# Altium PCB PCB.Autolabor.PcbDoc
Units mm, origin at the board's own origin, x right, y up, seen from the top; angles counter-clockwise.
Board outline 100 x 100 mm, 2 copper layers (Top Layer, Bottom Layer); 35 components, 13 nets, 160 pads, 5 vias.
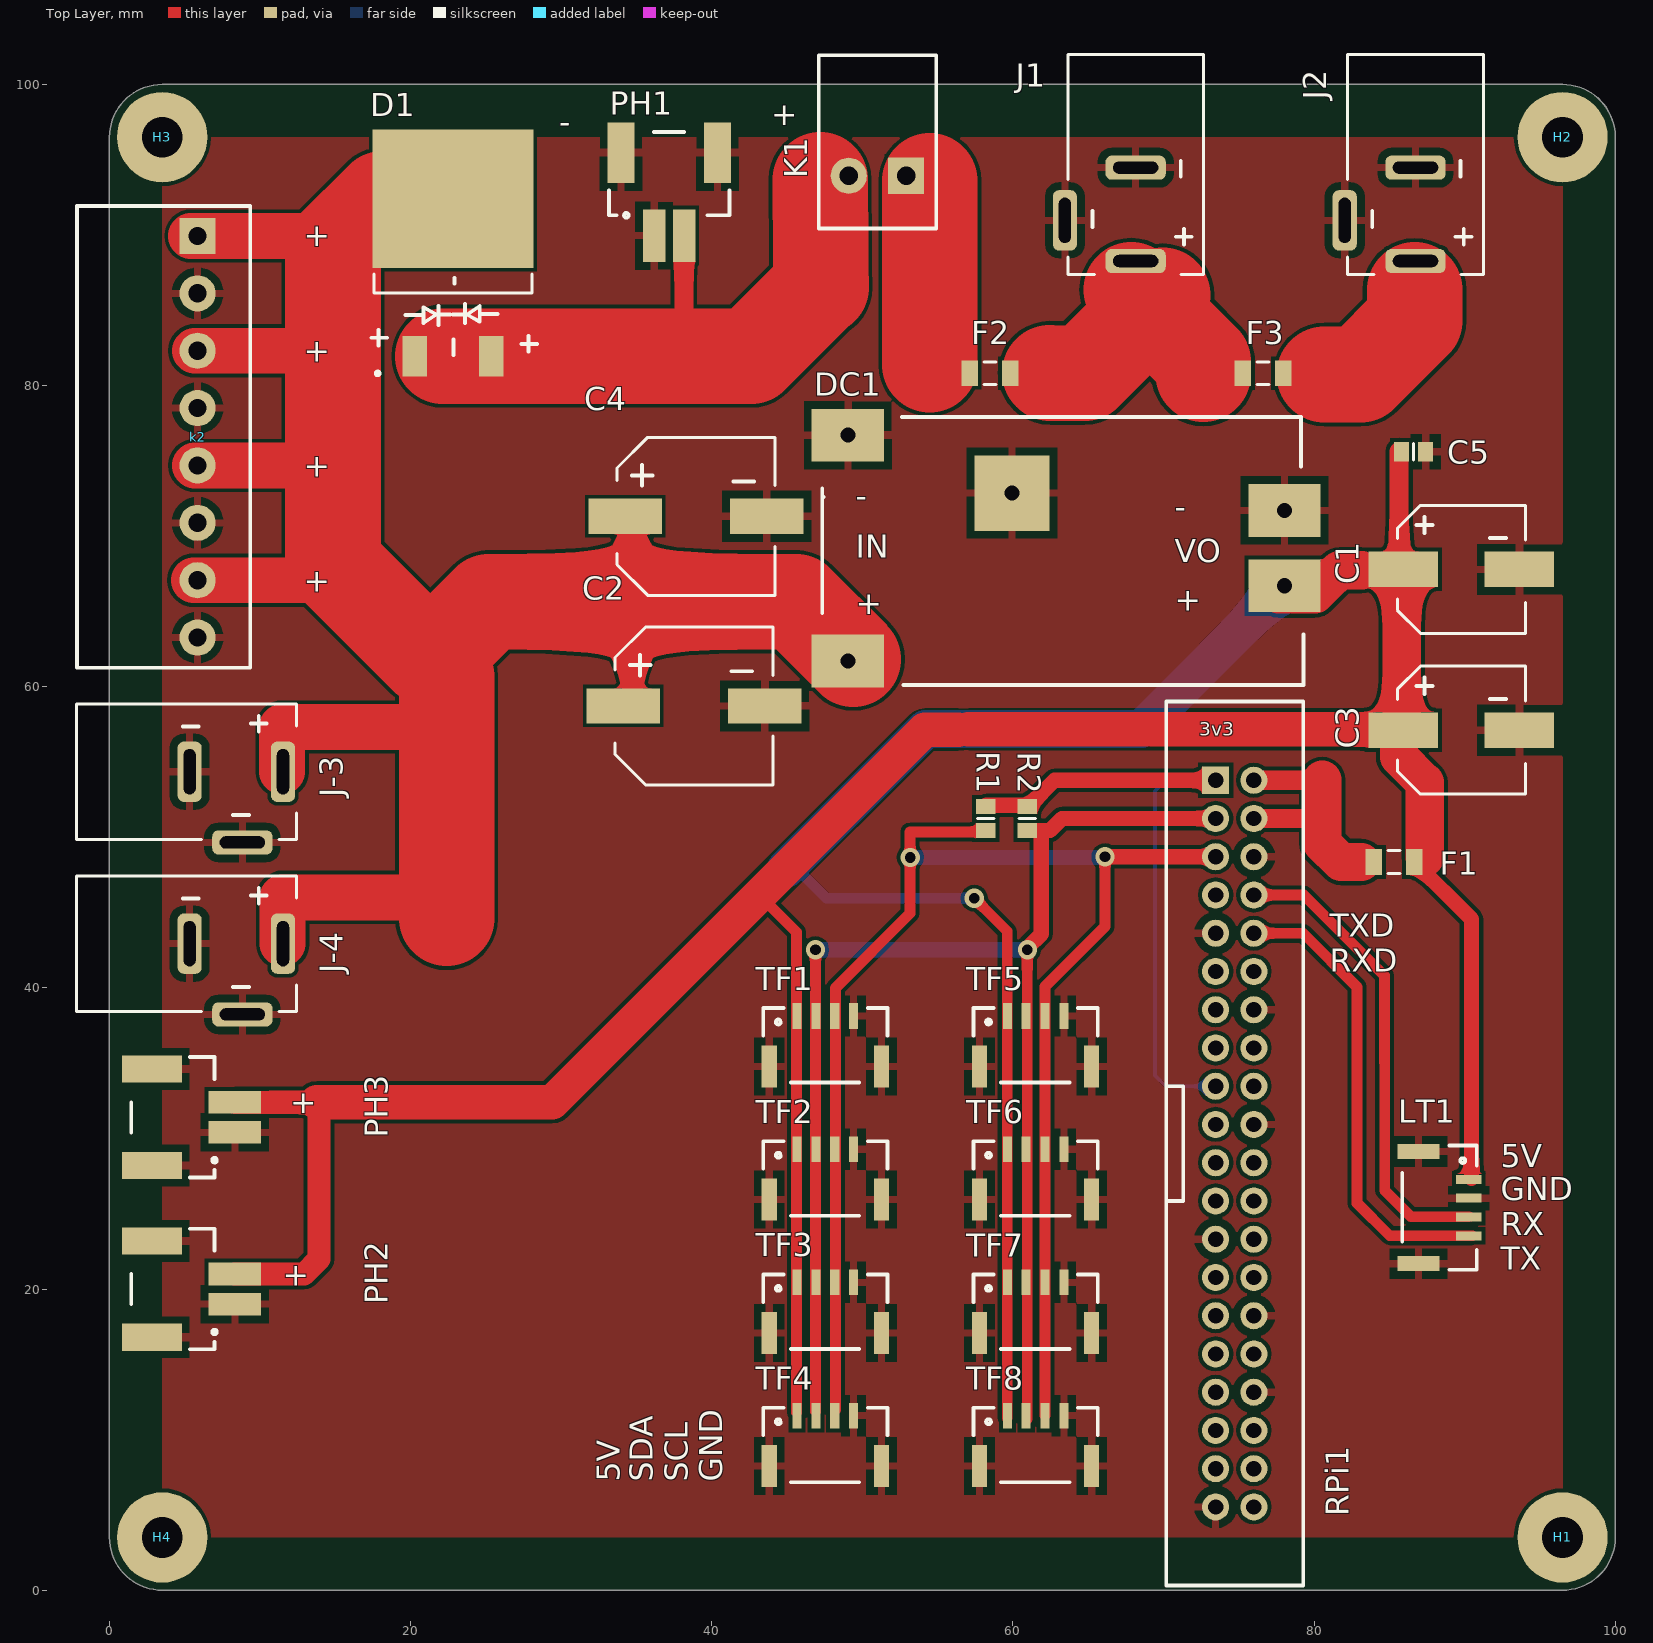
[diagram p0: Top Layer view]
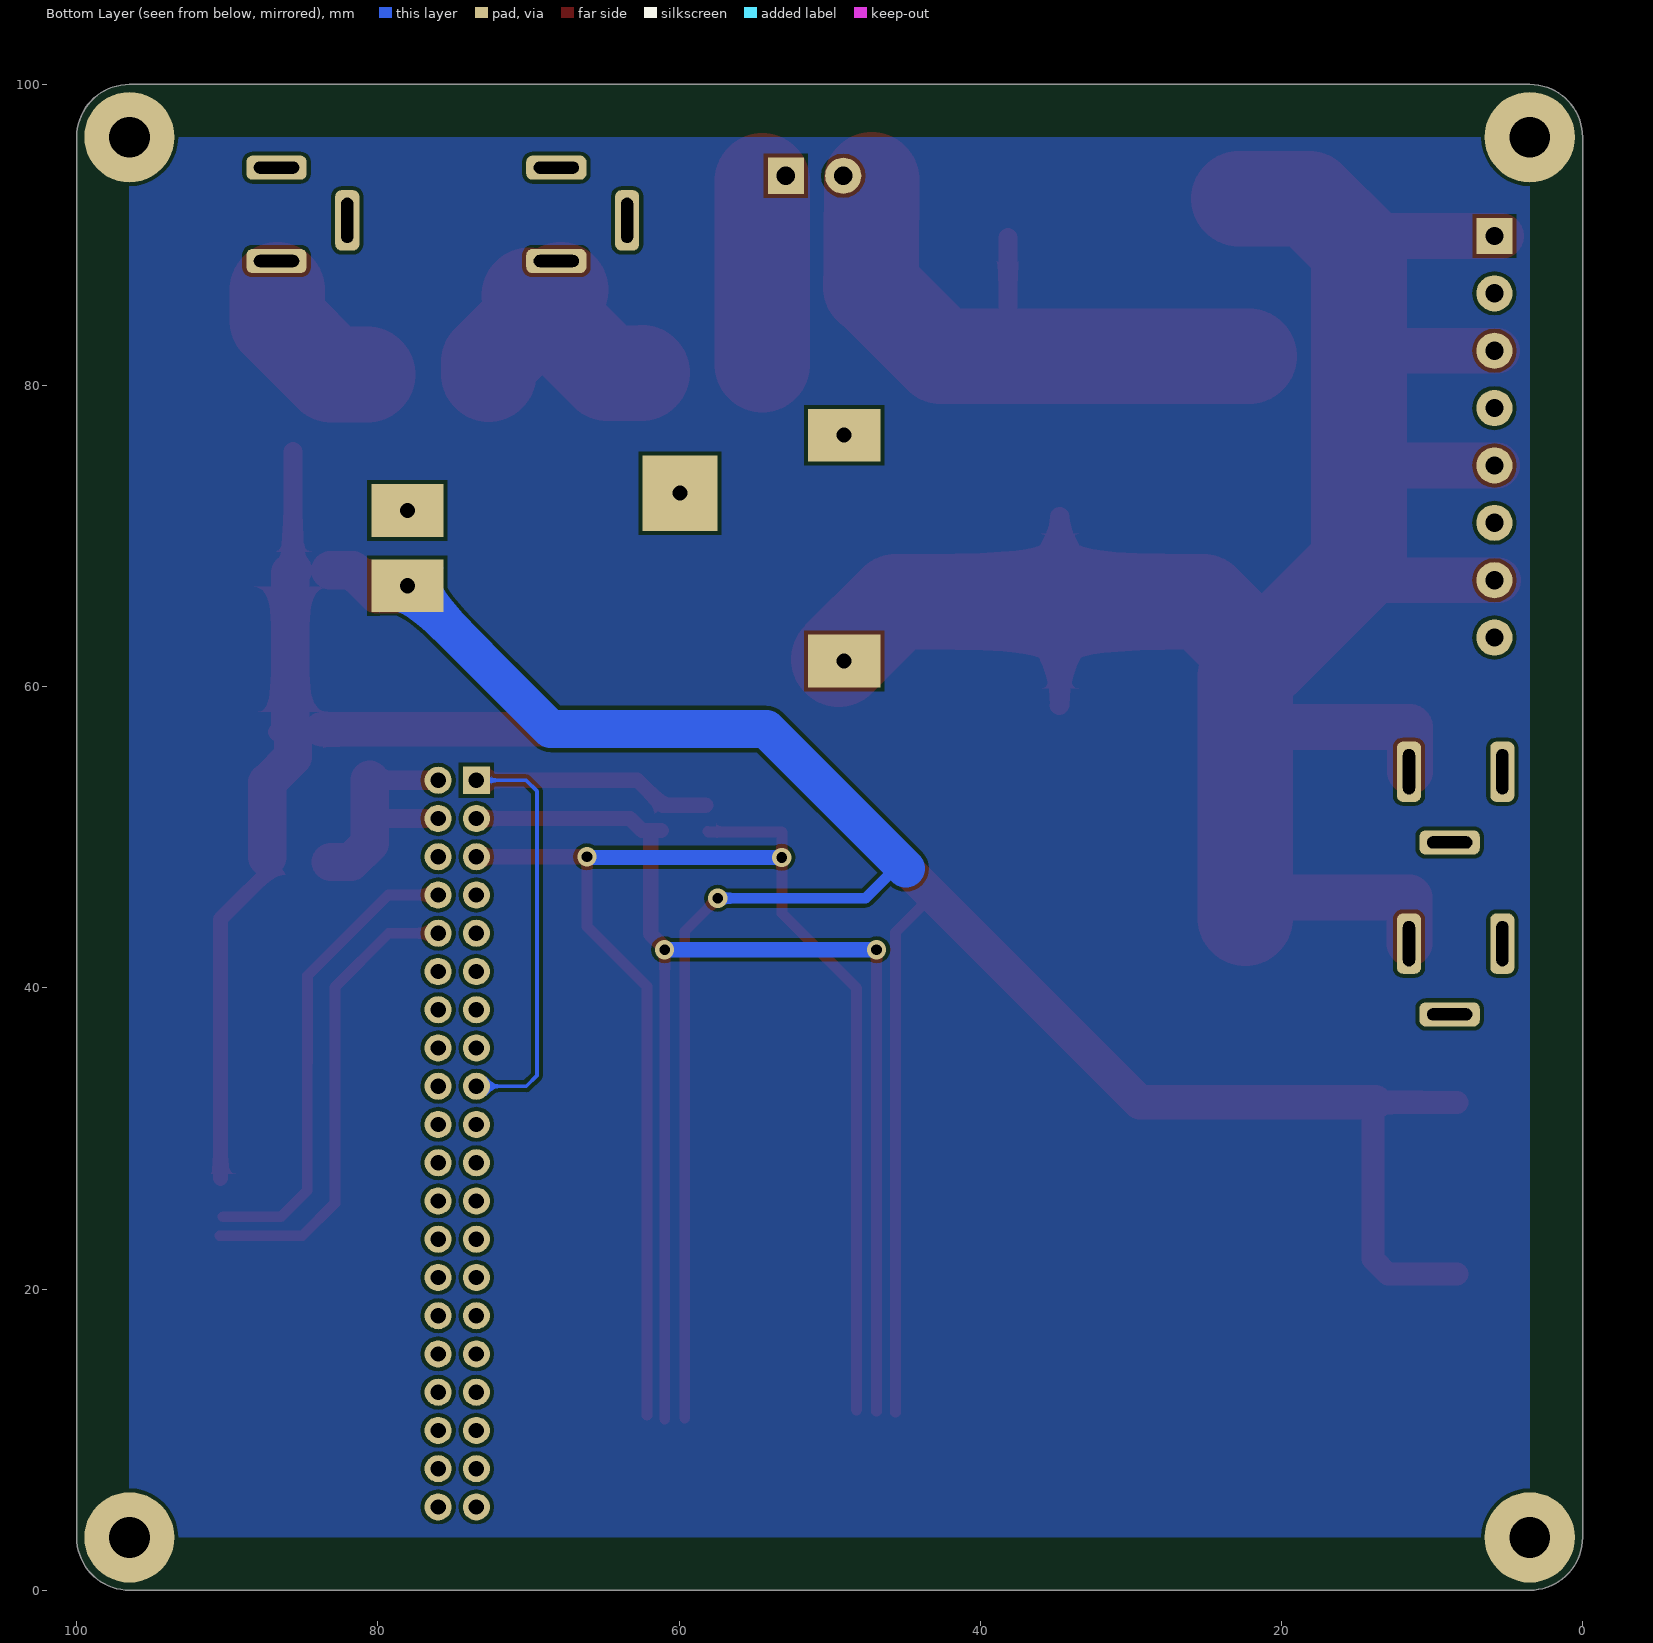
[diagram p1: Bottom Layer view, seen from below]

## Layer stack, top to bottom
Top Solder: solder mask 0.0102, Solder Resist, Dk 3.5
Top Layer: signal copper 0.0356
Dielectric 1: dielectric 0.32, FR-4, Dk 4.8
Bottom Layer: signal copper 0.0356
Bottom Solder: solder mask 0.0102, Solder Resist, Dk 3.5

## Board outline
0,3.5 0,96.5 cw(c3.5,96.5) 3.5,100 96.5,100 cw(c96.5,96.5) 100,96.5 100,3.5 cw(c96.5,3.5) 96.5,0 3.5,0 cw(c3.5,3.5)

## Design rules (kind name [scope] priority, off if disabled: settings)
AcuteAngle [All] p1: minimum=6.00000000000000E+0001 checktracksonly=FALSE
Clearance [All] p1: gap=0.254 ignorepadtopadclearanceinfootprint=FALSE
HoleSize [All] p1: absolutevalues=TRUE maxlimit=6.3 minlimit=0.25 maxpercent=80.000 minpercent=20.000
PolygonConnect [All] p1: connectstyle=Relief reliefconductorwidth=0.508 reliefentries=4 polygonreliefangle="90 Angle" airgapwidth=0.508
RoutingVias [All] p1: holewidth=0.711 width=1.27 viastyle="Through Hole" minholewidth=0.711 minwidth=1.27 maxholewidth=0.711 maxwidth=1.27
SMDNeckDown [All] p1 off: percent=50.000
SilkToSolderMaskClearance [IsPad] p1: minsilkscreentomaskgap=0.152 clearancetoexposedcopper=TRUE
SolderMaskExpansion [All] p1: expansion=0.102
Width Width_12V_5A [InNetClass('CHARGE12V5A')] p1: maxlimit=6.35 minlimit=2.54 preferedwidth=2.54
Width Width_5V_2A [InNetClass('PWR5V4A')] p2: maxlimit=5.08 minlimit=0.254 preferedwidth=2.54
Width Width_12V_10A [InNetClass('BAT12V10A')] p3: maxlimit=6.35 minlimit=2.54 preferedwidth=2.54
Width [All] p4: maxlimit=7.62 minlimit=0.254 preferedwidth=0.254
28 further rules are at their usual default settings.

## Classes and differential pairs
component class Sheet.Autolabor: LT1 R1 R2 RPi1 TF1 TF2 TF3 TF4 TF5 TF6 TF7 TF8
component class Sheet.Autolabor.Power: C1 C2 C3 C4 C5 D1 DC1 F1 F2 F3 H1 H2 H3 H4 J1 J2 J-3 J-4 K1 k2 PH1 PH2 PH3

## Components (designator, comment, footprint, x,y, rotation, side; value= is the part's Value field where it differs from the comment)
C1 "Cap Pol1" CAPAE8883X102M 89.778,67.795 r0 top value=470uF
C2 "Cap Pol1" CAPAE108103X102M 38.819,58.722 r0 top value=1000uF
C3 "Cap Pol1" CAPAE8883X102M 89.778,57.111 r0 top value=470uF
C4 "Cap Pol1" CAPAE108103X102M 38.951,71.317 r0 top value=1000uF
C5 "Cap" 6-0805_L 86.609,75.605 r180 top value=0.1uF
D1 "MBRB2060" D2PAK_M 22.813,88.808 r90 top
DC1 "DM21_40W05S" DM21_40W05S-HOLE 49.037,61.704 r0 top
F1 "Fuse  3A" C1206 85.3,48.362 r0 top
F2 "Fuse 10A" C1206 58.471,80.823 r180 top
F3 "Fuse 10A" C1206 76.606,80.823 r180 top
H1 "HOLE-2.7-6" HOLE-2.7-6#1 55.068,-8.561 r0 top
H2 "HOLE-2.7-6" HOLE-2.7-6#2 119.842,58.425 r0 top
H3 "HOLE-2.7-6" HOLE-2.7-6#3 59.182,72.009 r0 top
H4 "HOLE-2.7-6" HOLE-2.7-6#4 -0.254,-0.127 r0 top
J1 "PWR2.5" KLD-0202-SLOT 68.148,101.971 r270 top
J2 "PWR2.5" KLD-0202-SLOT 86.733,101.971 r270 top
J-3 "PWR2.5" KLD-0202-SLOT -2.175,54.357 r0 top
J-4 "PWR2.5" KLD-0202-SLOT -2.175,42.938 r0 top
K1 "KF2EDG-2P" KF2EDG-3.81-2P 52.908,93.932 r180 top
k2 "KF2EDG-8P" KF2EDG-3.81-8P 5.852,89.934 r270 top
LT1 "LinkTrack" GH1.25-S-4P-small 90.276,27.283 r270 top
PH1 "PH2.0-2p" PH2.0-LIE-2P 36.172,89.957 r0 top
PH2 "PH2.0-2p" PH2.0-LIE-2P 8.326,19 r90 top
PH3 "PH2.0-2p" PH2.0-LIE-2P 8.326,30.403 r90 top
R1 "Res2" 6-0805_L 58.188,51.245 r90 top value=1K8
R2 "Res2" 6-0805_L 60.955,51.245 r90 top value=1K8
RPi1 "Raspberrypi4B" RPi-40p-small 73.46,53.789 r0 top
TF1 "TFmini Plus" GH1.25-S-4P-small 45.666,38.136 r0 top
TF2 "TFmini Plus" GH1.25-S-4P-small 45.666,29.288 r0 top
TF3 "TFmini Plus" GH1.25-S-4P-small 45.666,20.44 r0 top
TF4 "TFmini Plus" GH1.25-S-4P-small 45.666,11.592 r0 top
TF5 "TFmini Plus" GH1.25-S-4P-small 59.628,38.136 r0 top
TF6 "TFmini Plus" GH1.25-S-4P-small 59.628,29.288 r0 top
TF7 "TFmini Plus" GH1.25-S-4P-small 59.628,20.44 r0 top
TF8 "TFmini Plus" GH1.25-S-4P-small 59.628,11.592 r0 top

## Footprints (in the part's own frame and the unit in brackets; to place one, negate y for a bottom-side part, rotate by r counter-clockwise, add the part's x,y. Pads: shape width x height; smd on the part's side, far side on the other; paste and mask are expansions set on the pad)
6-0805_L [mm] "Chip Resistor, Body 2.0x1.2mm, IPC High Density"
  rect 1x1.3 smd: 1(-0.8,0) 2(0.8,0)
  silkscreen extent 0,-0.55 0,0.55, body extent -1.07,-0.7 1.07,0.7, height 0.7
C1206 [mm] "Chip Capacitor, Body 3.2x1.6mm, IPC High Density"
  rect 1.1x1.7 smd: 1(-1.35,0) 2(1.35,0)
  silkscreen extent -0.4,-0.75 0.4,0.75, body extent -1.7,-0.9 1.7,0.9, height 1.3
CAPAE8883X102M [mm] "Aluminum Electrolytic Capacitor, Body 8.30x8.30x10.20mm, IPC Low Density"
  rect 4.6x2.35 smd: 1(-3.85,0) 2(3.85,0)
  silkscreen extent -4.25,-4.25 4.25,4.25, body extent -4.4,-4.25 4.4,4.25, height 10.2
CAPAE108103X102M [mm] "Aluminum Electrolytic Capacitor, Body 10.30x10.30x10.20mm, IPC Low Density"
  rect 4.9x2.35 smd: 1(-4.7,0) 2(4.7,0)
  silkscreen extent -5.25,-5.25 5.25,5.25, body extent -5.4,-5.25 5.4,5.25, height 10.2
D2PAK_M [mm] "D2-PAK, 4-Leads, Body 8.8x10.4mm, Pitch 2.54mm, Lead Span 15.1mm, IPC Low Density"
  rect 2.7x1.6 smd: 1(-6.85,2.54) 3(-6.85,-2.54)
  rect 9.2x10.7 smd: 2(3.6,0)
  silkscreen extent -8.12,-5.58 -1.4,5.42, body extent -2.65,-5.28 6.35,5.28, height 4.69
DM21_40W05S-HOLE [mm]
  rect 4.8x3.5 hole 1: 1(0,15) 2(0,0) 3(29,5) 4(29,10)
  rect 5x5 hole 1: MP(10.9,11.15)
  silkscreen extent -1.7,-1.6 30.25,16.2
GH1.25-S-4P-small [mm]
  rect 0.6x1.7 smd: 1(0,0) 2(1.25,0) 3(2.5,0) 4(3.75,0)
  rect 1x2.8 smd: MP1(-1.85,-3.35) MP2(5.6,-3.35)
  silkscreen extent -2.25,-4.43 6,0.52
HOLE-2.7-6#1 [mm]
  round 6 hole 2.7: 1(41.432,12.061)
HOLE-2.7-6#2 [mm]
  round 6 hole 2.7: 1(-23.342,38.075)
HOLE-2.7-6#3 [mm]
  round 6 hole 2.7: 1(-55.682,24.491)
HOLE-2.7-6#4 [mm]
  round 6 hole 2.7: 1(3.754,3.627)
KF2EDG-3.81-2P [mm]
  rect 2.4x2.4 hole 1.21: 1(0,0)
  round 2.4 hole 1.21: 2(3.81,0)
  silkscreen extent -2,-8 5.81,3.5
KF2EDG-3.81-8P [mm]
  rect 2.4x2.4 hole 1.21: 1(0,0)
  round 2.4 hole 1.21: 2(3.81,0) 3(7.62,0) 4(11.43,0) 5(15.24,0) 6(19.05,0) 7(22.86,0) 8(26.67,0)
  silkscreen extent -2,-8 28.67,3.5
KLD-0202-SLOT [mm] "DC Power Jack, 2.5mm, KLD Series, PCB Mount"
  rrect50% 1.6x4 hole 0.8 slot 3 at 90 deg: 1(13.7,0) 3(7.5,0)
  rrect50% 4x1.6 hole 0.8 slot 3 at 0 deg: 2(11,-4.7)
  silkscreen extent 0,-4.5 14.6,4.5
PH2.0-LIE-2P [mm]
  rect 1.5x3.5 smd: 1(0,0) 2(2,0)
  rect 1.8x4 smd: MP1(-2.2,5.5) MP2(4.2,5.5)
  silkscreen extent -3,1.2 5,6.88
RPi-40p-small [mm]
  round 1.8 hole 1.02: 3(0,-2.54) 3V3(0,-20.32) 5(0,-5.08) 5V(2.54,-2.54) 5V(2.54,0) 7(0,-7.62) 8(2.54,-7.62) 10(2.54,-10.16) 11(0,-12.7) 12(2.54,-12.7) 13(0,-15.24) 15(0,-17.78) 16(2.54,-17.78) 18(2.54,-20.32) 19(0,-22.86) 21(0,-25.4) 22(2.54,-25.4) 23(0,-27.94) 24(2.54,-27.94) 26(2.54,-30.48) 27(0,-33.02) 28(2.54,-33.02) 29(0,-35.56) 31(0,-38.1) 32(2.54,-38.1) 33(0,-40.64) 35(0,-43.18) 36(2.54,-43.18) 37(0,-45.72) 38(2.54,-45.72) 40(2.54,-48.26) G(0,-48.26) G(0,-30.48) G(0,-10.16) G(2.54,-40.64) G(2.54,-35.56) G(2.54,-22.86) G(2.54,-15.24) G(2.54,-5.08)
  rect 1.8x1.8 hole 1.02: 3V3(0,0)
  silkscreen extent -3.28,-53.48 5.82,5.22

## Part data
C1 C2 C3 C4: "Polarized Capacitor (Radial)", LatestRevisionDate=17-Jul-2002, LatestRevisionNote="Re-released for DXP Platform.", PackageDescription="Polarized Capacitor (Radial); 2 Leads", PackageReference=RB7.6-15, Published=8-Jun-2000, Publisher="Altium Limited"
C5: "Capacitor", LatestRevisionDate=17-Jul-2002, LatestRevisionNote="Re-released for DXP Platform.", PackageDescription="Radial Cap, Thru-Hole; 2 Leads; 0.3 in Pin Spacing", PackageReference=RAD-0.3, Published=8-Jun-2000, Publisher="Altium Limited"
D1: library part Schottky-MBRB, "Schottky Diode", Code_JEDEC=DO-214-AA, LatestRevisionDate=17-Jul-2002, LatestRevisionNote="Re-released for DXP Platform.", PackageDescription="DO-214-AA/SMB; 2 C-Bend Leads; Body 5.3 x 3.6 mm, inc. leads (LxW)", PackageReference=SMB, Published=8-Jun-2000, Publisher="Altium Limited"
F1 F2 F3: library part "Fuse 1", "Fuse", LatestRevisionDate=17-Jul-2002, LatestRevisionNote="Re-released for DXP Platform.", PackageDescription="Thru-Hole; 2 Leads", PackageReference=PIN-W2/E2.8, Published=8-Jun-2000, Publisher="Altium Limited"
J1 J2 J-3 J-4: "Low Voltage Power Supply Connector", ComponentLink1Description="Manufacturer Link", ComponentLink1URL=http://domino.kycon.com/internet/Products.html, DatasheetDocument=09-May-2002, Published=17-Dec-2003, Publisher="Altium Limited"
R1 R2: "Resistor", LatestRevisionDate=17-Jul-2002, LatestRevisionNote="Re-released for DXP Platform.", PackageDescription="Axial Device, Thru-Hole; 2 Leads; 0.4 in Pin Spacing", PackageReference=AXIAL-0.4, Published=8-Jun-2000, Publisher="Altium Limited"
RPi1: library part Raspberrypi4B_EX
TF1 TF2 TF3 TF4 TF5 TF6 TF7 TF8: library part TF, "TF"

## Via types
v1: diameter 1.27, hole 0.711, Top Layer to Bottom Layer, tented both sides, 5 vias

## Nets (pads, with @x,y where several pads share a name; then routed paths per layer and width w, separated by ;. In a path a pad name is that pad's centre, name@x,y a point inside that pad or via, vN(x,y) a via of type N, cw(c..) or ccw(c..) an arc to the next point about the centre after c; other vN are vias at no path point)
B_F_12V: C2.1 C4.1 D1.2 DC1.2 J-3.1 J-4.1 k2.1 k2.3 k2.5 k2.7 | length 155.2
  Top Layer w1.27: C4.1@34.714,71.313 34.714,65.641 34.714,58.799 C2.1@34.747,58.766
  Top Layer w3.048: k2.1@5.424,89.934 k2.1 14.253,89.934 14.664,89.524 ; k2.7@5.599,67.074 k2.7 13.56,67.074 13.656,66.978 ; k2.5@5.669,74.694 k2.5 12.363,74.694 12.564,74.493 ; k2.3@5.669,82.314 k2.3 13.014,82.314 13.278,82.05 ; J-3.1@11.468,54.357 11.468,57.323 20.934,57.323 20.938,57.32 ; J-4.1@11.503,42.938 11.503,46.01 20.892,46.01 20.895,46.007
  Top Layer w6.35: 21.043,62.008 14.844,68.206 14.844,89.095 18.158,92.408 D1.2 ; 21.85,62.291 25.2,65.641 34.714,65.641 45.594,65.641 DC1.2@49.402,61.833 ; 22.386,44.614 22.386,60.665
BAT_12V: F2.1 F3.2 J1.1 | length 17.3
  Top Layer w6.35: 62.439,80.85 62.466,80.823 64.77,80.823 69.943,85.996 ; 67.852,86.368 69.083,85.136 72.632,81.588 72.632,80.744
CHG_12V6: F3.1 J2.1 | length 9.5
  Top Layer w6.35: 80.687,80.733 83.092,80.733 86.673,84.314 86.673,86.345
GND: C1.2 C2.2 C3.2 C4.2 C5.1 DC1.1 DC1.4 DC1.MP J1.2 J1.3 J2.2 J2.3 J-3.2 J-3.3 J-4.2 J-4.3 k2.2 k2.4 k2.6 k2.8 LT1.2 LT1.MP1 LT1.MP2 PH1.1 PH1.MP1 PH1.MP2 PH2.1 PH2.MP1 PH2.MP2 PH3.1 PH3.MP1 PH3.MP2 RPi1.G TF1.4 TF1.MP1 TF1.MP2 TF2.4 TF2.MP1 TF2.MP2 TF3.4 TF3.MP1 TF3.MP2 TF4.4 TF4.MP1 TF4.MP2 TF5.4 TF5.MP1 TF5.MP2 TF6.4 TF6.MP1 TF6.MP2 TF7.4 TF7.MP1 TF7.MP2 TF8.4 TF8.MP1 TF8.MP2
NetD1_1: D1.1 D1.3 K1.2 PH1.2 | length 41.7
  Top Layer w1.27: 38.153,83.969 PH1.2@38.153,89.834
  Top Layer w6.35: 22.148,81.958 D1.3 42.613,81.958 47.228,86.573 47.228,88.379 ; 47.192,93.667 47.193,91.329 ; 47.228,86.96 47.228,91.198 ; 47.264,86.518 47.264,86.96
NetF2_2: F2.2 K1.1 | length 12.2
  Top Layer w6.35: 54.483,81.389 54.483,93.582
PI_3V3: R1.2 R2.2 RPi1.3V3 | length 43.6
  Top Layer w0.254: R1.2@58.157,52.202 R1.2@58.228,52.132 ; R2.2@60.48,51.801 R2.2@60.514,51.834
  Top Layer w1.016: R1.2@58.228,52.132 61.101,52.132 62.758,53.789 RPi1.3V3@73.46,53.789
  Bottom Layer w0.254: RPi1.3V3@73.46,33.469 70.145,33.469 69.442,34.172 69.442,53.064 70.164,53.786 73.4,53.786 RPi1.3V3@73.464,53.722
PI_5V: F1.1 RPi1.5V | length 15.1
  Top Layer w1.27: RPi1.5V@76,53.789 79.538,53.789 79.692,53.943 ; RPi1.5V@76.054,51.195 76,51.249 79.703,51.249 79.879,51.074
  Top Layer w2.54: 80.534,53.818 80.534,49.608 81.78,48.362 83.135,48.362
RXD0: LT1.4 RPi1.10 | length 31.2
  Top Layer w0.711: RPi1.10 79.282,43.629 82.848,40.063 82.848,25.707 85.019,23.536 LT1.4@90.507,23.536
SCL: R1.1 RPi1.5 TF1.3 TF2.3 TF3.3 TF4.3 TF5.3 TF6.3 TF7.3 TF8.3 | length 104.6
  Top Layer w0.254: TF4.3@48.129,11.88 TF4.3@48.211,11.961 ; R1.1@58.174,50.432 R1.1 ; TF8.3@62.094,11.594 TF8.3@62.127,11.626
  Top Layer w0.711: TF4.3@48.211,11.961 48.211,38.136 48.211,39.991 53.168,44.948 53.168,50.356 58.038,50.356 R1.1@58.085,50.402 ; TF8.3@62.127,11.626 62.127,38.136 62.127,40.091 66.109,44.073 66.109,45.742 ; 66.113,45.742 66.113,48.651 v1(66.113,48.704)
  Top Layer w1.016: v1@66.113,48.651 66.172,48.709 RPi1.5
  Bottom Layer w1.016: v1(53.183,48.664) 66.073,48.664 v1(66.113,48.704)
SDA: R2.1 RPi1.3 TF1.2 TF2.2 TF3.2 TF4.2 TF5.2 TF6.2 TF7.2 TF8.2 | length 97.7
  Top Layer w0.254: TF4.2@46.717,11.715 TF4.2@46.884,11.882 ; 46.747,21.547 46.841,21.641 ; R2.1@60.863,50.573 61.077,50.359 R2.1@61.265,50.359 ; TF8.2@60.932,11.348 TF8.2@60.955,11.371 ; R2.1@60.949,50.359 R2.1@60.955,50.359
  Top Layer w0.711: TF4.2@46.884,11.882 v1(46.884,42.534) ; TF8.2@60.955,11.371 v1(60.955,42.534)
  Top Layer w1.016: v1(60.955,42.534) 60.955,42.666 61.882,43.593 61.882,50.409 ; R2.1@61.166,50.449 62.463,50.449 63.263,51.249 RPi1.3
  Bottom Layer w0.254: v1(60.955,42.534) v1@60.999,42.534
  Bottom Layer w1.016: v1(46.884,42.534) v1(60.955,42.534)
TXD0: LT1.3 RPi1.8 | length 33.1
  Top Layer w0.254: LT1.3@90.284,24.795 LT1.3@90.355,24.723
  Top Layer w0.711: RPi1.8 79.305,46.169 84.677,40.798 84.677,35.07 ; 84.684,36.627 84.684,26.551 86.439,24.795 LT1.3@90.284,24.795
VCC5V: C1.1 C3.1 C5.2 DC1.3 F1.2 LT1.1 PH2.2 PH3.2 TF1.1 TF2.1 TF3.1 TF4.1 TF5.1 TF6.1 TF7.1 TF8.1 | length 282.8
  Top Layer w0.508: 45.591,21.545 45.591,21.585 ; TF4.1@45.594,11.779 TF4.1@45.629,11.813 ; TF8.1@59.587,11.399 TF8.1@59.618,11.43 ; LT1.1@90.41,27.329 LT1.1@90.448,27.367
  Top Layer w0.711: 43.318,46.001 45.629,43.689 TF4.1@45.629,11.813 ; v1@57.47,45.913 57.47,45.912 59.618,43.764 TF8.1@59.618,11.43
  Top Layer w1.016: F1.2 90.448,44.563 LT1.1@90.448,27.367
  Top Layer w1.27: C1.1@85.642,67.742 C5.2@85.642,75.623 ; C3.1@86.411,57.221 C3.1@86.65,56.982
  Top Layer w1.524: PH2.2 12.926,21 13.91,21.983 13.91,32.256 13.763,32.403 PH3.2
  Top Layer w2.286: 13.763,32.403 29.392,32.403 54.144,57.155 56.372,57.155 ; 57.048,57.176 C3.1@83.764,57.176
  Top Layer w2.54: DC1.3@77.631,66.117 80.05,66.117 81.663,67.73 83.165,67.73 ; C3.1@85.642,57.176 85.642,55.346 87.34,53.649 87.34,48.667 ; C1.1@85.642,67.742 85.821,67.563 C3.1@85.821,57.181
  Bottom Layer w0.711: 45.423,48.147 47.618,45.952 v1(57.43,45.952)
  Bottom Layer w2.54: 44.946,47.935 54.205,57.194 68.527,57.194 DC1.3
pads on no net: H1.1 H2.1 H3.1 H4.1 RPi1.7 RPi1.11 RPi1.12 RPi1.13 RPi1.15 RPi1.16 RPi1.18 RPi1.19 RPi1.21 RPi1.22 RPi1.23 RPi1.24 RPi1.26 RPi1.27 RPi1.28 RPi1.29 RPi1.31 RPi1.32 RPi1.33 RPi1.35 RPi1.36 RPi1.37 RPi1.38 RPi1.40

## Polygon pours and split planes (outlines as drawn)
GND on Top Layer "Top Layer-GND" (solid, pour order 16): 3.5,96.5 96.5,96.5 96.5,3.5 3.5,3.5
no net on Top Layer "Top Layer-No Net" (solid, pour order 2): 59.309,86.639
no net on Bottom Layer "Bottom Layer-No Net" (solid, pour order 12): 3.5,96.5 96.5,96.5 96.5,3.5 3.5,3.5

## Silkscreen, mask and mechanical layers (free items; w line width, h text height)
Top Overlay:
  lines w0.254: 47.404,72.581 47.407,72.581 ; 47.404,72.591 47.41,72.591
  text "+" at 43.948,97.272 h1.52
  text "-" at 29.863,96.764 h1.52
  text "+" at 12.901,89.239 h1.52
  text "+" at 12.901,81.596 h1.52
  text "+" at 12.901,73.953 h1.52
  text "+" at 12.901,66.31 h1.52
  text "TXD" at 81.05,43.38 h1.52
  text "RXD" at 81.05,41.074 h1.52
  text "+" at 12.013,31.669 h1.52
  text "5V" at 92.4,28.1 h1.52
  text "GND" at 92.4,25.894 h1.52
  text "RX" at 92.4,23.588 h1.52
  text "TX" at 92.4,21.283 h1.52
  text "+" at 11.49,20.222 h1.52
  text "5V" at 33.884,7.193 h1.52 r90
  text "SDA" at 36.09,7.193 h1.52 r90
  text "SCL" at 38.396,7.193 h1.52 r90
  text "GND" at 40.702,7.193 h1.52 r90
Top Solder:
  lines w0: 0.173,43.596 0.173,45.167
  lines w0.508: 86.716,86.071 86.733,86.071
  lines w0.635: 15.27,68.236 15.27,89.949 18.961,93.641 ; 15.293,68.139 22.608,60.824 22.608,60.802 ; 20.379,82.112 41.9,82.112 46.861,87.072 ; 21.599,61.845 23.833,64.079 ; 22.649,60.795 22.652,44.697 ; 23.821,64.057 25.571,65.806 44.175,65.806 ; 44.195,65.847 47.513,62.529 ; 46.598,86.792 49.047,89.241 49.047,91.632 ; 53.054,91.617 54.54,90.131 54.54,83.03 56.357,81.213 ; 60.265,81.103 62.632,81.103 67.366,85.837 ; 69.403,85.837 74.523,80.718 ; 78.163,80.853 82.431,80.853 86.511,84.934
  lines w1.27: 18.961,93.641 19.612,93.641 ; 47.513,62.529 48.374,62.529 ; 67.366,85.837 69.403,85.837
Mechanical 1:
  the board outline again, w0.254

## Text inside footprints (layer, text, board x,y; h text height)
DC1: Top Overlay "IN" at 49.545,68.562 h1.52; Top Overlay "VO" at 70.729,68.257 h1.52; Top Overlay "-" at 49.545,71.915 h1.52; Top Overlay "-" at 70.729,71.178 h1.52; Top Overlay "+" at 49.545,64.803 h1.52; Top Overlay "+" at 70.729,65.032 h1.52
RPi1: Top Overlay "3v3" at 72.36,56.439 h1.52